# Altium PCB Ledtourch.PcbDoc
Units mm, origin at the board's own origin, x right, y up, seen from the top; angles counter-clockwise.
Board outline 11.5 x 11.5 mm, 2 copper layers (Top Layer, Bottom Layer); 4 components, 3 nets, 11 pads, 3 vias.
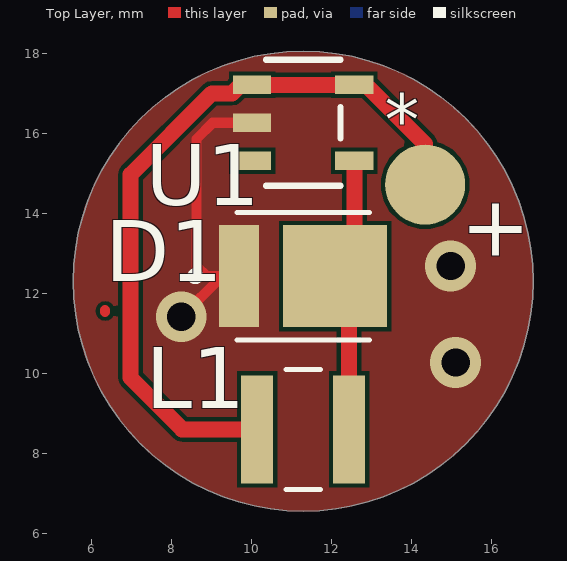
[diagram p0: Top Layer view]
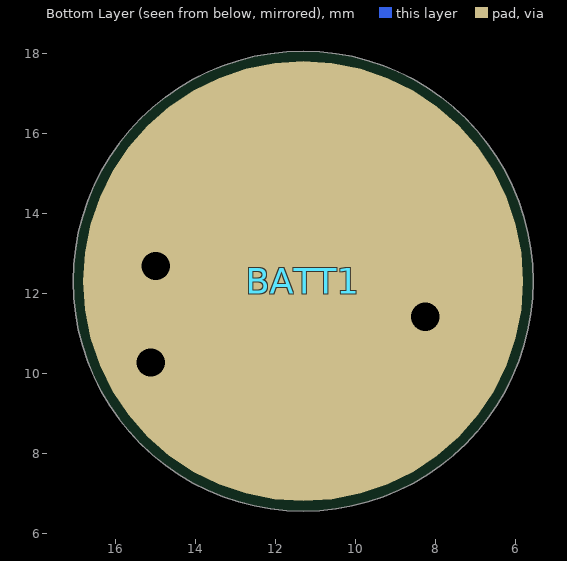
[diagram p1: Bottom Layer view, seen from below]
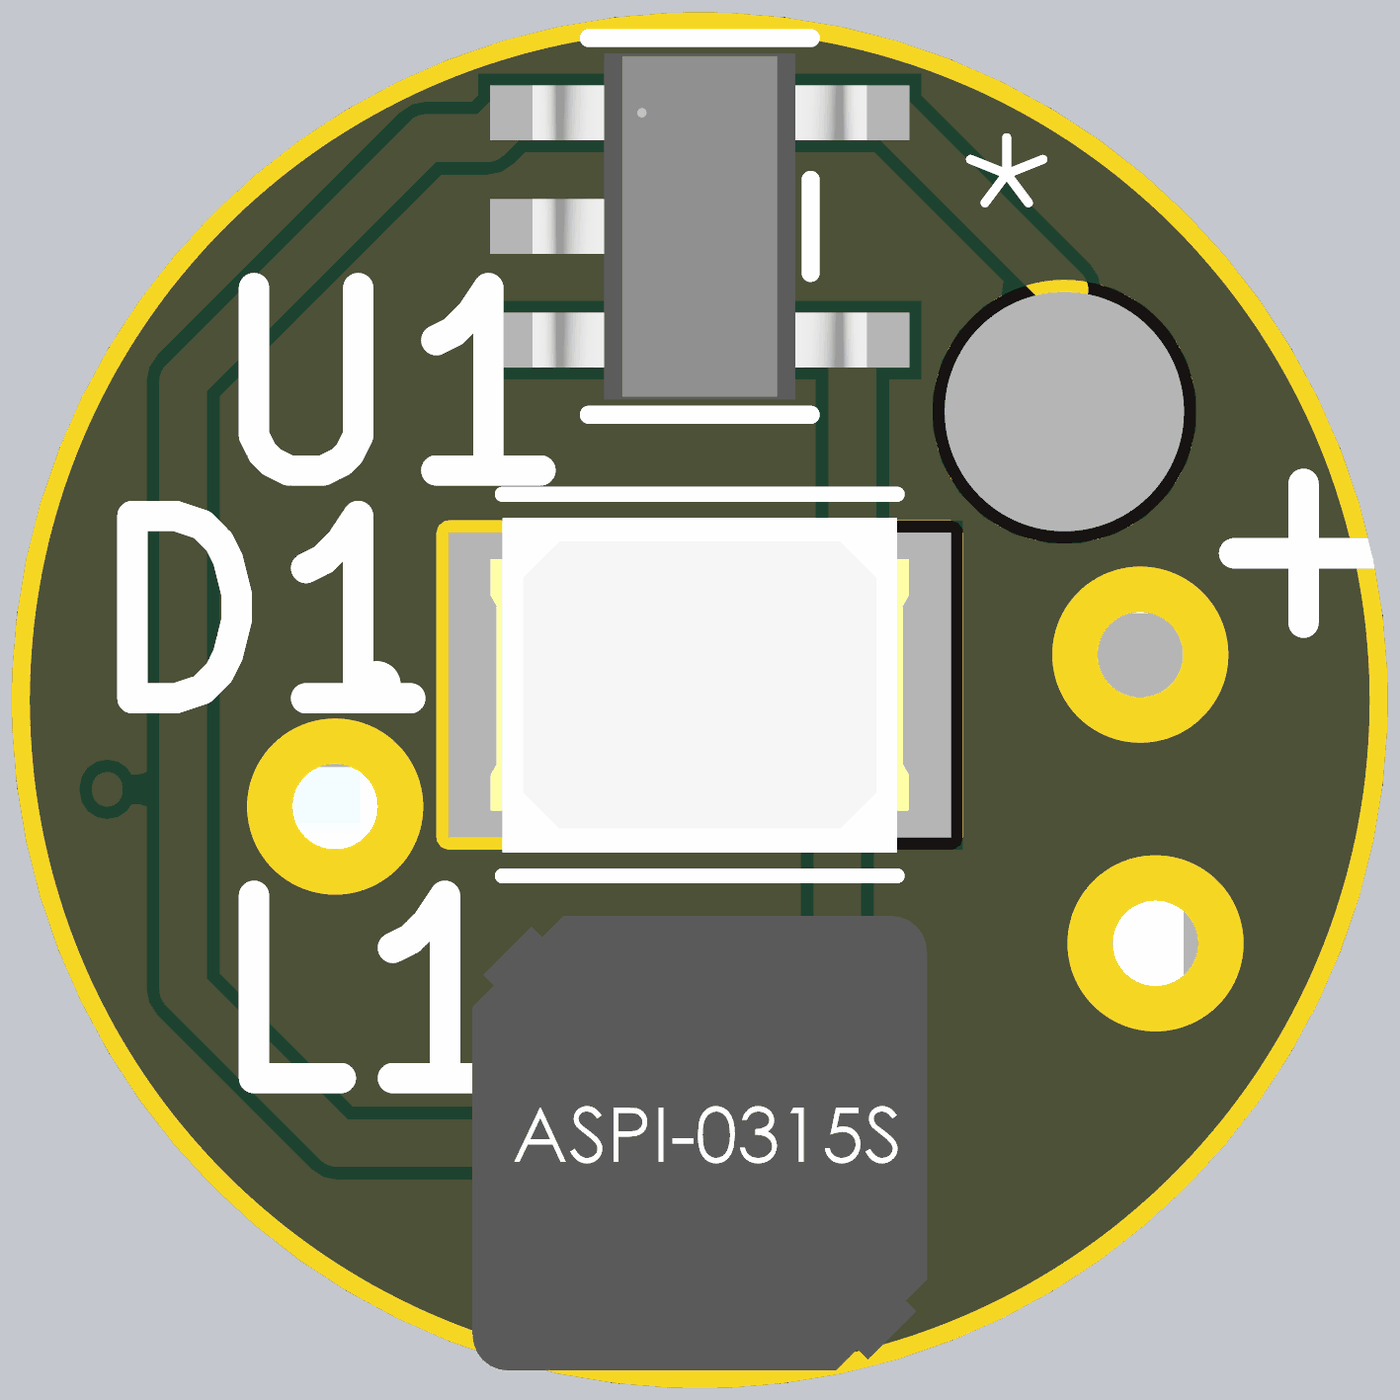
[diagram p2: 3D render of the assembled board from above, using the file's embedded part models]

## Layer stack, top to bottom
Top Solder: solder mask 0.0102, Solder Resist, Dk 3.5
Top Layer: signal copper 0.0356
Dielectric 1: dielectric 0.32, FR-4, Dk 4.8
Bottom Layer: signal copper 0.0356
Bottom Solder: solder mask 0.0102, Solder Resist, Dk 3.5

## Board outline
11.303,6.569 cw(c11.303,12.319) 5.553,12.319 cw(c11.303,12.319) 11.303,18.069 cw(c11.303,12.319) 17.053,12.319 cw(c11.303,12.319)

## Design rules (kind name [scope] priority, off if disabled: settings)
Clearance [All] p1: gap=0.1 ignorepadtopadclearanceinfootprint=FALSE except(0: Arc-Hole Track-Hole SMDPad-Hole THPad-Hole Via-Hole Fill-Hole Poly-Hole Region-Hole Text-Hole)
ComponentClearance [All] p1 off: gap=0.254 collisioncheckmode=3 verticalgap=0.1 showdistances=FALSE
Height [All] p1 off: minheight=0 maxheight=25.4 prefheight=12.7
PolygonConnect [All] p1: connectstyle=Relief reliefconductorwidth=0.254 reliefentries=4 polygonreliefangle="90 Angle" airgapwidth=0.254
RoutingVias [All] p1: holewidth=0.711 width=1.27 viastyle="Through Hole" minholewidth=0.711 minwidth=1.27 maxholewidth=0.711 maxwidth=1.27
SolderMaskExpansion [All] p1: expansion=0.102 istentingtop=FALSE
Width [All] p1: maxlimit=2.5 minlimit=0.254 preferedwidth=0.254 minimp=50.000000 maximp=50.000000 favimp=50.000000
28 further rules are at their usual default settings.

## Components (designator, comment, footprint, x,y, rotation, side; value= is the part's Value field where it differs from the comment)
BATT1 "5203" AAA_BATT_SPRING_SOL 11.303,12.319 r180 bottom
D1 "LED2830" LED_OF-SMD2835Y 11.303,12.446 r0 top
L1 "22uH" IND_ASPI-0315S-220M-T 11.303,8.617 r0 top
U1 "BOOSTDRIVE" TSOT23-5_ZXLD383_DIO 11.303,16.28 r0 top

## Footprints (in the part's own frame and the unit in brackets; to place one, negate y for a bottom-side part, rotate by r counter-clockwise, add the part's x,y. Pads: shape width x height; smd on the part's side, far side on the other; paste and mask are expansions set on the pad)
AAA_BATT_SPRING_SOL [mm]
  round 11 smd: 1(0,0)
  body extent -4.05,-3.97 3.96,4.03, height 7.52
IND_ASPI-0315S-220M-T [mm]
  rect 0.8x2.7 smd: 1(-1.15,0) 2(1.15,0)
  silkscreen extent -0.43,-1.5 0.43,1.5, body extent -1.9,-1.9 1.9,1.9, height 1.9
LED_OF-SMD2835Y [mm]
  rect 2.6x2.55 smd: A(0.8,0)
  rect 1x2.55 smd: C(-1.6,0)
  silkscreen extent -2.8,-1.6 1.65,1.6, body extent -1.75,-1.4 1.75,1.4, height 0.75
TSOT23-5_ZXLD383_DIO [mil]
  rect 37.5x18 smd paste+0 mask+0: 1(-50.25,37.4) 2(-50.25,0) 3(-50.25,-37.4) 4(50.25,-37.4) 5(50.25,37.4)
  silkscreen extent -36,-62 36,62, body extent -55,-57 55,57, height 39

## Part data
BATT1: "3M Half Facepiece Disposable Respirator Assembly 5203, OrganicVapor/Acid Gas", Manufacturer="Keystone Electronics", Supplier Part Number 1=36-5203-ND, Category="Batteries and Accessories", ComponentLink1Description=https://datasheet.ciiva.com/3/5203-3938.pdf?src-supplier=Digikey, ComponentLink1URL=https://datasheet.ciiva.com/3/5203-3938.pdf?src-supplier=Digikey, ComponentLink2Description=https://datasheet.ciiva.com/11714/0900766b8001d7c7-11714676.pdf?src-supplier=Rs, ComponentLink2URL=https://datasheet.ciiva.com/11714/0900766b8001d7c7-11714676.pdf?src-supplier=Rs, ComponentLink3Description=https://datasheet.ciiva.com/1390/1718267-1390390.pdf?src-supplier=Element14, ComponentLink3URL=https://datasheet.ciiva.com/1390/1718267-1390390.pdf?src-supplier=Element14, ComponentLink4Description=https://datasheet.ciiva.com/16499/m60-2p14-16499587.pdf?src-supplier=Future+Electronics, ComponentLink4URL=https://datasheet.ciiva.com/16499/m60-2p14-16499587.pdf?src-supplier=Future+Electronics, Manufacturer Part Number=5203, Pricing 1="1=0.45, 10=0.372, 25=0.3452, 100=0.3086, 500=0.271, 1000=0.25623, 2500=0.23794, 5000=0.22497 (USD)", RoHS=Yes, Stock 1=18441, Supplier 1=Digikey
D1: library part BXEN-40E-13H-9B-00-0-0, "LED Uni-Color White 127lm 4000K Chip LED 2-Pin SMD T/R", Case Code (Imperial)=1113, Color=White, Color Rendering Index (CRI)=80, Correlated Color Temperature (CCT)=4000K, Forward Voltage=9.2V, Manufacturer=Bridgelux, Max Current Rating=120mA, Supplier Part Number 1=976-1620-2-ND, Test Current=100mA, Thermal Resistance of Package=10°C/W, Case/Package=1113, ComponentLink1Description=http://www.bridgelux.com/sites/default/files/resource_media/DS58_Rev%20B%20Gen2%20SMD%202835%201W%209V%20Data%20sheet.pdf?src-supplier=Digikey, ComponentLink1URL=http://www.bridgelux.com/sites/default/files/resource_media/DS58_Rev%20B%20Gen2%20SMD%202835%201W%209V%20Data%20sheet.pdf?src-supplier=Digikey, Manufacturer Part Number=BXEN-40E-13H-9B-00-0-0, Mount="Surface Mount", Packaging="Cut Tape", Pricing 1="17000=0.03041, 34000=0.02845, 51000=0.02747, 85000=0.02639, 119000=0.02576, 170000=0.02515 (USD)", RoHS=No, Series=2835, Stock 1=17000, Supplier 1=Digikey, Viewing Angle=116°
L1: library part ASPI-0315S-220M-T, "Inductor Power Shielded Wirewound 22uH 20% 100KHz 400mA 430mOhm DCR T/R", Manufacturer=Abracon, Supplier Part Number 1=535-ASPI-0315S-220M-TCT-ND, Category="Fixed Inductors", ComponentLink1Description=https://datasheet.ciiva.com/1080/aspi-s315-4614rd-1080391.pdf?src-supplier=Digikey, ComponentLink1URL=https://datasheet.ciiva.com/1080/aspi-s315-4614rd-1080391.pdf?src-supplier=Digikey, ComponentLink2Description=https://datasheet.ciiva.com/1080/aspi-0315s-1080392.pdf?src-supplier=Digikey, ComponentLink2URL=https://datasheet.ciiva.com/1080/aspi-0315s-1080392.pdf?src-supplier=Digikey, ComponentLink3Description=https://datasheet.ciiva.com/8518/aspi-0315s-8518249.pdf?src-supplier=Avnet, ComponentLink3URL=https://datasheet.ciiva.com/8518/aspi-0315s-8518249.pdf?src-supplier=Avnet, Manufacturer Part Number=ASPI-0315S-220M-T, Pricing 1="1=0.54, 10=0.446, 100=0.3666, 1000=0.30148 (USD)", RoHS=Yes, Stock 1=2923, Supplier 1=Digikey
U1: library part ZXLD383ET5TA, "ZXLD383 Series 50 mA 330 kHz Single or Multi Cell LED Driver Solution TSOT-23-5", Case/Package=TSOT, Frequency=330kHz, Manufacturer="Diodes Zetex", Max Operating Temperature=85°C, Max Power Dissipation=450mW, Max Supply Current=20mA, Max Supply Voltage=3.3V, Min Operating Temperature=-20°C, Min Supply Voltage=900mV, Output Current per Channel=320mA, Output Voltage=20V, Package Quantity=3000, Supplier Part Number 1=ZXLD383ET5CT-ND, Category="LED Drivers", ComponentLink1Description=https://datasheet.ciiva.com/3164/zxld383-3164098.pdf?src-supplier=Avnet, ComponentLink1URL=https://datasheet.ciiva.com/3164/zxld383-3164098.pdf?src-supplier=Avnet, ComponentLink2Description=https://datasheet.ciiva.com/3164/zxld383-3164098.pdf?src-supplier=Mouser, ComponentLink2URL=https://datasheet.ciiva.com/3164/zxld383-3164098.pdf?src-supplier=Mouser, ComponentLink3Description=https://datasheet.ciiva.com/15135/getdatasheetpartid-662810-15135755.pdf?src-supplier=Verical, ComponentLink3URL=https://datasheet.ciiva.com/15135/getdatasheetpartid-662810-15135755.pdf?src-supplier=Verical, ComponentLink4Description=https://datasheet.ciiva.com/1944/zxld383-1944733.pdf?src-supplier=Digikey, ComponentLink4URL=https://datasheet.ciiva.com/1944/zxld383-1944733.pdf?src-supplier=Digikey, ComponentLink5Description=https://datasheet.ciiva.com/1944/zxld383-1944734.pdf?src-supplier=Digikey, ComponentLink5URL=https://datasheet.ciiva.com/1944/zxld383-1944734.pdf?src-supplier=Digikey, ComponentLink6Description=https://datasheet.ciiva.com/1944/zxld383-1944735.pdf?src-supplier=Digikey, ComponentLink6URL=https://datasheet.ciiva.com/1944/zxld383-1944735.pdf?src-supplier=Digikey, ComponentLink7Description=https://datasheet.ciiva.com/16508/zxld383-16508469.pdf?src-supplier=Future+Electronics, ComponentLink7URL=https://datasheet.ciiva.com/16508/zxld383-16508469.pdf?src-supplier=Future+Electronics, Height=0.9mm, Lead Free="Lead Free", Length=2.9mm, Manufacturer Part Number=ZXLD383ET5TA, Mount="Surface Mount", Number of Outputs=1, Number of Pins=5, Packaging="Tape and Reel", Power Dissipation=450mW, Pricing 1="1=1.66, 10=1.023, 25=0.8572, 100=0.6693, 250=0.577, 500=0.52018, 1000=0.47257 (USD)", Radiation Hardening=No, Reach SVHC Compliant=Yes, RoHS=No, RoHS Compliant=No, Series=-, Stock 1=45571, Supplier 1=Digikey, Supply Current=20mA, Switching Frequency-Max=330kHz, Topology=Boost, Width=1.6mm

## Free pads (board coordinates)
  round 2 smd: +(14.351,14.732)

## Via types
v1: diameter 1.27, hole 0.711, Top Layer to Bottom Layer, 3 vias

## Nets (pads, with @x,y where several pads share a name; then routed paths per layer and width w, separated by ;. In a path a pad name is that pad's centre, name@x,y a point inside that pad or via, vN(x,y) a via of type N, cw(c..) or ccw(c..) an arc to the next point about the centre after c; other vN are vias at no path point)
GND: BATT1.1 D1.C U1.2 | length 7.3
  Top Layer w0.254: v1(8.255,11.43) D1.C@9.271,12.446 ; D1.C D1.C@9.271,12.446 ; U1.2 9.041,16.28 8.636,15.875 8.636,12.7 8.89,12.446 D1.C@9.271,12.446
  other v1: 15.113,10.287 14.986,12.7
NetD1_A: D1.A L1.2 U1.4 | length 7.1
  Top Layer w0.4: L1.2 12.453,12.096 D1.A 12.579,12.922 U1.4
Vin: L1.1 pad.+ U1.1 U1.5 | length 18.7
  Top Layer w0.254: U1.5 U1.5@12.869,17.23 ; pad.+ 14.351,15.748
  Top Layer w0.4: L1.1 8.274,8.617 6.985,9.906 6.985,14.986 9.017,17.018 9.525,17.018 9.737,17.23 U1.1 U1.5 ; U1.5@12.869,17.23 14.351,15.748
pads on no net: U1.3
copper on no net: | length 0
  Top Layer w0.254: 6.35,11.557 6.35,11.592

## Polygon pours and split planes (outlines as drawn)
GND on Top Layer "GND_L01_P001" (solid, pour order 1): 11.303,6.569 cw(c11.303,12.319) 5.553,12.319 cw(c11.303,12.319) 11.303,18.069 cw(c11.303,12.319) 17.053,12.319 cw(c11.303,12.319)

## Silkscreen, mask and mechanical layers (free items; w line width, h text height)
Top Overlay:
  text "+" at 15.24,12.954 h1.52
Top Solder:
  circle w0.3: c11.303,12.319 r5.75
Mechanical 1:
  circle w0.2: c11.303,12.319 r5.75
  circle w0.254: c89.662,85.09 r7.903

## Text inside footprints (layer, text, board x,y; h text height)
U1: Top Overlay "*" at 13.335,15.748 h1.27; Mechanical 13 "*" at 10.439,16.468 h1.27